# Altium PCB 核心板.PcbDoc (part 2 of 2)
Units mil, origin at the board's own origin, x right, y up, seen from the top; angles counter-clockwise.
Board outline 3687.4 x 2855.91 mil, 2 copper layers (Top Layer, Bottom Layer); 94 components, 147 nets, 533 pads, 209 vias.
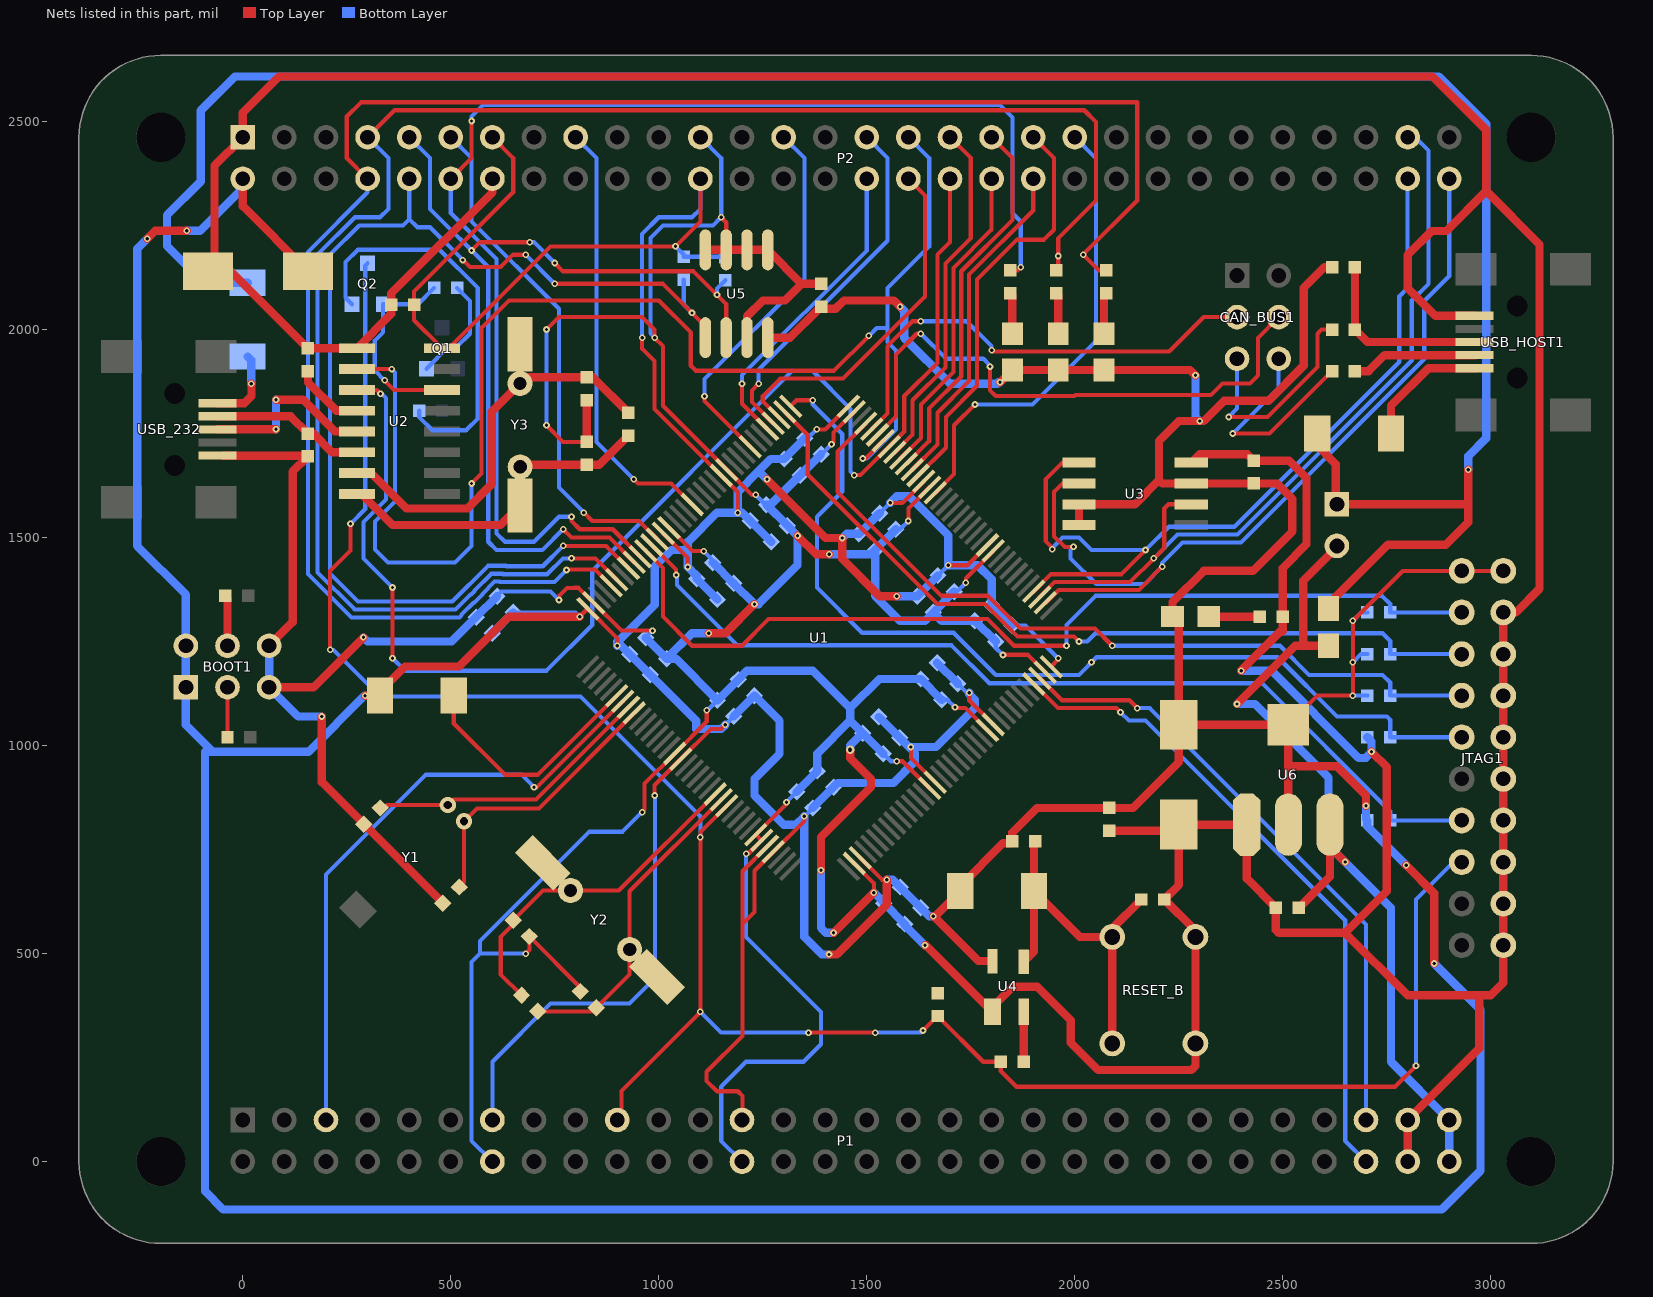
[diagram p2: the nets of this part, all layers, seen from the top]

## Via types
v1: diameter 16, hole 8, Top Layer to Bottom Layer, 208 vias
v2: diameter 20, hole 10, Top Layer to Bottom Layer, 1 vias

## Nets (pads, with @x,y where several pads share a name; then routed paths per layer and width w, separated by ;. In a path a pad name is that pad's centre, name@x,y a point inside that pad or via, vN(x,y) a via of type N, cw(c..) or ccw(c..) an arc to the next point about the centre after c; other vN are vias at no path point) (continued)
GND: BOOT1.5 BOOT1.6 C1.2 C2.2 C3.1 C4.2 C5.2 C6.1 C7.1 C8.2 C9.2 C10.2 C11.2 C12.1 C13.1 C14.1 C15.1 C16.1 C17.1 C18.1 C19.1 C20.1 C21.1 C22.1 C23.1 C24.1 C25.1 C26.1 C27.2 C28.2 C29.2 C30.2 C31.2 C32.2 C33.2 C34.2 C35.2 C36.1 C37.2 C38.2 C39.2 CT1.2 CT2.2 JTAG1.4 JTAG1.6 JTAG1.8 JTAG1.10 JTAG1.12 JTAG1.14 JTAG1.16 JTAG1.18 JTAG1.20 P1.14 P1.26 P1.57 P1.58 P2.1 P2.14 P2.23 R6.1 R11.2 R16.1 RESET_B.1 U1.16 U1.30 U1.31 U1.38 U1.51 U1.61 U1.71 U1.83 U1.94 U1.107 U1.120 U1.130 U1.143 U2.1 U3.4 U4.1 U5.1 U5.2 U5.3 U5.4 U5.7 U6.1 USB_232.5 USB_HOST1.5 | length 25275.8
  Top Layer w10: v1(680,500) 688.89,508.89 C5.2@688.89,541.11 811.11,418.89 C4.2@811.11,408.89 ; v1(730,1770) 770,1730 C24.1@826.69,1730 ; v1(730,2000) 760,2030 960,2030 990,2000 v1(990,1980) 1010,1960 1010,1816.82 U1.120@1163.8,1663.03 1224.28,1602.55 v1(1233.05,1602.55) ; v1(760,1350) 760,1360 779,1379 796.98,1379 797.25,1379.26 807.27,1379.26 U1.143@843.65,1342.88 910.24,1276.29 v1(984.82,1276.29) ; v1(960,840) 966,846 966,908.45 U1.16@1038.52,980.98 1115.34,1057.79 v1(1115.34,1085.16) ; U1.130@1024.6,1523.83 1081.1,1467.34 v1(1107.84,1467.34) ; v1(1150,2270) 1162,2258 U5.3@1162,2191.46 ; v1(1210,740) 1215.13,740 U1.31@1247.31,772.18 U1.30@1233.4,786.1 1306.84,859.55 v1(1306.84,863.66) ; v1(1415.14,1724.35) 1420,1729.21 1420,1752.19 U1.107@1470.03,1802.22 ; U1.38@1469.12,716.51 U1.38@1470.03,716.51 1517.57,668.96 1517.57,647.07 v1(1516.97,646.47) ; v1(1571.82,962.32) 1586.11,962.32 U1.51@1650.98,897.46 ; v1(1600,1540) 1600,1570.29 U1.94@1650.98,1621.27 ; v1(1711.82,1092.32) 1714.14,1090 1736.82,1090 U1.61@1790.17,1036.65 ; v1(1738.2,1391.3) 1738.2,1402.26 U1.83@1804.09,1468.15 ; v1(1827.22,1217.72) 1827.98,1218.48 1886.73,1218.48 U1.71@1929.37,1175.85
  Top Layer w20: CT1.2@-90,2140 CT1.2@-83.31,2140 ; CT1.2@-73,2150.31 CT1.2@-83.31,2140 ; USB_232.5@-48.01,1697.01 15.75,1697.01 154.68,1697.01 R11.2@156.69,1695 120,1658.31 120,1296.69 BOOT1.6@63.31,1240 ; BOOT1.5@63.31,1140 170,1140 v1(290,1260) ; v1(190,1070) 190,912.22 C2.2@481.11,621.11 ; P2.14@600,2362.2 600,2330 356.69,2086.69 C3.1@356.69,2060 356.69,2037.36 U2.1@274.33,1955 C10.2@156.69,1955 -28.31,2140 CT1.2@-83.31,2140 ; C24.1@826.69,1730 C25.1@826.69,1830 ; U5.4@1112,2191.46 U5.3@1162,2191.46 U5.2@1212,2191.46 U5.1@1262,2191.46 1343.46,2110 ; v1(1120,1270) 1160,1270 v1(1230,1340) ; U5.7@1212,1980.54 1212,2032 1250,2070 1303.46,2070 1343.46,2110 ; v1(1333.62,1504.13) 1377.75,1460 v1(1410,1460) ; v1(1390,700) 1390,780 1510,900 1510,920 1460,970 v2(1460,990) ; C26.1@1390,2110 1343.46,2110 ; v1(1420,550) 1420.5,550 v1(1516.97,646.47) ; v1(1640,520) 1642.04,520 U4.1@1802.04,360 1802.04,372.04 1850,420 1910,420 1990,340 1990,286.13 2056.13,220 2280,220 2290,230 RESET_B.1@2290,540 2290,555 C27.2@2215,630 2250,665 CT2.2@2250,810 ; C37.2@2083.31,795 2235,795 CT2.2@2250,810 ; U3.4@2280,1680.06 2299.94,1700 2415,1700 C11.2@2424.94,1690.06 ; v1(2400,1180) 2495,1275 2500,1275 2500,1379 2500,1427 2557,1484 2557,1643 2515,1685 C11.2@2430,1685 ; v1(2713.31,985) 2750,948.31 2750,650 2650,550 ; P1.58@2800,0 P1.57@2800,100 2972,272 2972,400 ; USB_HOST1.5@2960.94,2032.99 2867.01,2032.99 2800,2100 2800,2179 2858,2237 2893,2237 2989,2333 ; CT1.2@-83.31,2140 -68,2155.31 -68,2394.2 P2.1@0,2462.2 0,2521.2 87,2608.2 2860,2608.2 2989,2479.2 2989,2333 ; CT2.2@2250,810 2250.06,809.94 U6.1@2413.34,809.94 2413.34,679.97 C36.1@2483.31,610 2483.31,556.69 2490,550 2650,550 ; 2650,550 2800,400 2972,400 ; 2972,400 3000,400 3030,430 JTAG1.20@3030,520 JTAG1.18@3030,620 JTAG1.16@3030,720 JTAG1.14@3030,820 JTAG1.12@3030,920 JTAG1.10@3030,1020 JTAG1.8@3030,1120 JTAG1.6@3030,1220 JTAG1.4@3030,1320 3060,1320 3117,1377 3117,2205 2989,2333
  Bottom Layer w10: P1.14@600,0 550,50 550,480 569.99,499.99 ; C38.2@611.11,1358.89 622.22,1370 740,1370 v1(760,1350) ; v1(680,500) 569.99,499.99 ; v1(730,1770) v1(730,2000) ; v1(960,840) 913,793 833,793 570,530 570,499.99 ; C34.2@968.89,1258.89 968.24,1259.54 968.24,1259.71 v1(984.82,1276.29) ; v1(990,1980) 990,1981.11 980,1991.11 980,2220 1010,2250 1130,2250 v1(1150,2270) 1150,2412.2 P2.23@1100,2462.2 ; v1(1107.84,1467.34) 1130,1445.18 C6.1@1130,1440 ; v1(1115.34,1085.16) 1116.18,1084.32 1116.54,1084.32 C32.2@1141.11,1108.89 ; P1.26@1200,0 1150,50 1150,180 1210,240 1348,240 1390,282 1390,360 1210,540 v1(1210,740) ; v1(1233.05,1602.55) 1256.71,1578.89 C8.2@1258.89,1578.89 ; v1@1306.84,864.62 C30.2@1331.11,888.89 ; C12.1@1390,1700 1390.79,1700 v1(1415.14,1724.35) ; C22.1@1540,980 1557.68,962.32 v1(1571.82,962.32) ; C14.1@1570,1520 1580,1520 v1(1600,1540) ; C20.1@1680,1110 1694.14,1110 v1(1711.82,1092.32) ; C16.1@1710,1370 1716.9,1370 v1(1738.2,1391.3) ; C18.1@1810,1250 1810,1234.94 v1(1827.22,1217.72)
  Bottom Layer w20: BOOT1.6@63.31,1240 BOOT1.5@63.31,1140 133.31,1070 v1(190,1070) ; v1(290,1260) 300,1250 502.22,1250 C39.2@561.11,1308.89 C38.2@611.11,1358.89 ; C34.2@968.89,1258.89 C35.2@1018.89,1208.89 ; v1(1120,1270) 1080,1270 C35.2@1018.89,1208.89 ; C6.1@1130,1440 C7.1@1180,1390 v1(1230,1340) 1240,1340 1333.62,1433.62 v1(1333.62,1504.13) C9.2@1308.89,1528.89 ; C9.2@1308.89,1528.89 C8.2@1258.89,1578.89 1268.89,1578.89 C13.1@1340,1650 C12.1@1390,1700 ; C30.2@1331.11,888.89 C31.2@1381.11,938.89 1381.11,981.11 1460,1060 ; v1(1390,700) 1390,562 1402,550 v1(1420,550) ; v1(1410,1460) 1510,1460 C15.1@1520,1470 ; v2(1460,990) 1460,1000 C23.1@1490,1030 ; v1(1516.97,646.47) 1541.11,622.33 C28.2@1541.11,621.11 C29.2@1591.11,571.11 1591.11,568.89 v1(1640,520) ; C22.1@1540,980 C23.1@1490,1030 ; C14.1@1570,1520 C15.1@1520,1470 ; C20.1@1680,1110 C21.1@1630,1160 1530,1160 1460,1090 ; C16.1@1710,1370 C17.1@1660,1320 ; C18.1@1810,1250 C19.1@1760,1300 1680,1300 C17.1@1660,1320 ; v1(2400,1180) 2472.35,1180 2682.35,970 2700,970 2700,971.69 v1(2713.31,985) 2713.31,1010 R16.1@2703.31,1020 ; C35.2@1018.89,1208.89 1041.11,1208.89 C32.2@1141.11,1108.89 C33.2@1191.11,1158.89 1212.22,1180 1370,1180 1460,1090 ; 1460,1060 1460,1090 ; 1460,1060 C23.1@1490,1030 ; C15.1@1520,1470 1520,1360 1580,1300 1640,1300 C17.1@1660,1320
I2C1_SCL: P2.9 R22.1 U1.136 U5.6 | length 2270
  Top Layer w10: v1(550,2190) 570,2210 v1(690,2210) ; v1(750,2160) 770,2140 1083.5,2140 v1(1140,2083.5) 1162,2061.5 U5.6@1162,1980.54 ; v1(770,1520) 790,1500 881.4,1500 U1.136@941.09,1440.32
  Bottom Layer w10: P2.9@400,2462.2 450,2412.2 450,2290 590,2150 590,1490 610,1470 720,1470 v1(770,1520) ; v1(690,2210) 700,2210 v1(750,2160) ; v1(1140,2083.5) 1140,2098.5 R22.1@1160,2118.5
I2C1_SDA: P2.10 R17.1 U1.137 U5.5 | length 2893.5
  Top Layer w10: v1(529,2167) 546,2150 620,2150 650,2180 v1(680,2180) ; v1(750,2110) 1010,2110 v1(1080,2040) 1112,2008 U5.5@1112,1980.54 ; v1(770,1480) 873.56,1480 U1.137@927.17,1426.4
  Bottom Layer w10: 400,2296 P2.10@400,2362.2 ; v1(529,2167) 450,2246 420,2246 400,2266 400,2291.59 400,2265 385,2250 280,2250 210,2180 210,1413.18 277.18,1346 503.47,1346 589.57,1432.1 632.65,1432.1 633.77,1430.98 720.98,1430.98 v1(770,1480) ; v1(680,2180) v1(750,2110) ; R17.1@1060,2120 1060,2060 v1(1080,2040)
JTCK: JTAG1.9 R16.2 U1.109 | length 2322.1
  Top Layer w10: U1.109@1316.91,1816.14 1330.77,1830 v1(1370,1830)
  Bottom Layer w10: v1(1370,1830) 1370,1820 1441,1749 1441,1611 1380,1550 1380,1380 1488.88,1271.12 1708.88,1271.12 1810,1170 2010,1170 2052.26,1212.26 2487.74,1212.26 2630,1070 2750,1070 2758.31,1061.69 R16.2@2758.31,1020 JTAG1.9@2930,1020
  other v1: 2040,1200
JTDI: JTAG1.5 R14.2 U1.110 | length 1959.1
  Top Layer w10: U1.110@1302.99,1802.22 1302.99,1801.25 1358.11,1746.13 1358.11,1651.89 1670,1340 1784.13,1340 1862,1262.13 1997.87,1262.13 v1(2010,1250)
  Bottom Layer w10: v1(2010,1250) 2030,1250 2050,1270 2740,1270 2758.31,1251.69 R14.2@2758.31,1220 JTAG1.5@2930,1220
JTDO: JTAG1.13 R23.2 U1.133 | length 2255.3
  Top Layer w10: U1.133@982.85,1482.07 1041.61,1423.31 v1(1041.61,1410)
  Bottom Layer w10: v1(1041.61,1410) 1042.84,1410 1043.62,1409.22 1043.62,1386.38 1189,1241 1703.25,1241 1794.25,1150 2450,1150 2758.31,841.69 R23.2@2758.31,820 JTAG1.13@2930,820
JTMS: JTAG1.7 R15.2 U1.105 | length 1914
  Top Layer w10: U1.105@1497.86,1774.38 1430,1706.52 1430,1610 1680,1360 1791,1360 1869.87,1281.13 2048.87,1281.13 v1(2090,1240)
  Bottom Layer w10: v1(2090,1240) 2493.1,1240 2563.1,1170 2740,1170 2758.31,1151.69 R15.2@2758.31,1120 JTAG1.7@2930,1120
JTRST: JTAG1.3 R13.2 U1.134 | length 2284.5
  Top Layer w10: U1.134@968.93,1468.15 1010,1427.08 1010,1310 1080,1240 1200,1240 1264,1304 1790,1304 1854,1240 v1(1980,1240)
  Bottom Layer w10: v1(1980,1240) 1980,1290 2050,1360 2738.31,1360 2758.31,1340 R13.2@2758.31,1320 JTAG1.3@2930,1320
LED0: P2.7 R4.1 U1.139 | length 4189.5
  Top Layer w10: P2.7@300,2462.2 365,2527.2 2022.8,2527.2 2050.87,2499.13 2050.87,2310 1960,2219.13 v1(1960,2177) 1960,2146 1956,2142 R4.1@1955,2142 ; v1(790,1450) 847.89,1450 U1.139@899.33,1398.56
  Bottom Layer w10: P2.7@300,2462.2 350,2412.2 350,2290 330,2270 270,2270 180,2180 180,1416.31 269.31,1327 511.34,1327 547.44,1363.1 549.03,1363.1 556.9,1370.97 556.9,1372.56 597.44,1413.1 624.78,1413.1 625.9,1411.98 731.98,1411.98 770,1450 v1(790,1450)
LED1: P2.8 R5.1 U1.140 | length 4422.8
  Top Layer w10: P2.8@300,2362.2 250,2412.2 250,2512.2 284,2546.2 2150,2546.2 2150,2310 v1(2020,2180) 2058,2142 R5.1@2075,2142 ; v1(778,1422) 779,1423 847.05,1423 U1.140@885.41,1384.64
  Bottom Layer w10: P2.8@300,2362.2 300,2330 156.69,2186.69 156.69,1412.75 261.44,1308 520.8,1308 525.9,1313.1 525.9,1314.69 555.31,1344.1 556.9,1344.1 575.9,1363.1 575.9,1364.69 605.31,1394.1 616.91,1394.1 618.03,1392.98 748.98,1392.98 v1(778,1422)
LED2: P2.12 R7.1 U1.135 | length 3212.7
  Top Layer w10: P2.12@500,2362.2 550,2412.2 v1(550,2501.2) ; v1(790,1550) 790,1540 810,1520 889.24,1520 U1.135@955.01,1454.24 ; R7.1@1845,2142 1862,2142 v1(1870,2150)
  Bottom Layer w10: P2.12@500,2362.2 500,2280 610,2170 610,1510 630,1490 700,1490 760,1550 v1(790,1550) ; v1(550,2501.2) 550,2512.2 577.8,2540 1820,2540 1850,2510 1850,2280 1870,2260 v1(1870,2150)
NetBOOT1_3: BOOT1.3 R20.1 | length 120
  Top Layer w10: R20.1@-36.69,1020 BOOT1.3@-36.69,1140
NetBOOT1_4: BOOT1.4 R21.2 | length 122.1
  Top Layer w20: R21.2@-41.69,1360 -36.69,1355 BOOT1.4@-36.69,1240
NetC10_1: C10.1 U2.4 | length 172.6
  Top Layer w20: C10.1@156.69,1900 156.69,1873.31 225,1805 U2.4@274.33,1805
NetC24_2: C24.2 R10.2 U2.8 Y3.1 | length 734.1
  Top Layer w20: U2.8@274.33,1605 285,1605 360,1530 619.34,1530 Y3.1@666.69,1577.35 ; Y3.1@666.69,1670 671.69,1675 C24.2@826.69,1675 856.69,1675 R10.2@926.69,1745
NetC25_2: C25.2 R10.1 U2.7 Y3.2 | length 1049.5
  Top Layer w20: U2.7@274.33,1655 308.15,1655 393.15,1570 540,1570 598.19,1628.19 598.19,1802.36 Y3.2@666.27,1870.43 ; Y3.2@666.23,1964.61 666.27,1964.57 Y3.2@666.27,1870.43 ; R10.1@926.69,1800 841.69,1885 680.83,1885 Y3.2@666.27,1870.43
NetCAN_BUS1_5: CAN_BUS1.5 R24.2 | length 530.4
  Top Layer w10: v1(2370,1790) 2463.31,1790 2583.31,1910 2583.31,1990 2593.31,2000 R24.2@2618.31,2000
  Bottom Layer w10: v1(2370,1790) 2390,1810 CAN_BUS1.5@2390,1930
NetCAN_BUS1_6: CAN_BUS1.6 R25.2 | length 526
  Top Layer w10: v1(2380,1750) 2468.31,1750 R25.2@2618.31,1900
  Bottom Layer w10: v1(2380,1750) 2490,1860 CAN_BUS1.6@2490,1930
NetD1_2: D1.2 U1.6 | length 589
  Top Layer w10: D1.2@507.17,1120 507.17,1052.83 630,930 709.16,930 U1.6@899.33,1120.17
NetD3_1: D3.1 USB_232.1 | length 188
  Top Layer w20: USB_232.1@-60.94,1822.99 3.99,1822.99 21,1840 21,1869 v1(20,1870)
  Bottom Layer w20: D3.1@11.81,1935.2 20,1927.01 v1(20,1870)
NetD4_1: D4.1 USB_HOST1.1 | length 334.4
  Top Layer w20: D4.1@2770,1727 2760,1737 2760,1817 2850.01,1907.01 USB_HOST1.1@2963,1907.01
NetLED1_2: LED1.2 R5.2 | length 99.1
  Top Layer w20: LED1.2@2070,1990 2070,2082 R5.2@2075,2087
NetLED2_2: LED2.2 R4.2 | length 99.1
  Top Layer w20: R4.2@1955,2087 1960,2082 LED2.2@1960,1990
NetLED3_2: LED3.2 R7.2 | length 99.1
  Top Layer w20: R7.2@1845,2087 1850,2082 LED3.2@1850,1990
NetPOWER1_2: POWER1.2 R6.2 | length 123
  Top Layer w20: POWER1.2@2322.01,1310 R6.2@2445,1310
NetQ1_2: Q1.2 R2.2 | length 262.1
  Bottom Layer w10: Q1.2@441.65,1905.79 494.86,1959 515,1959 546,1990 546,2069 R2.2@515,2100
NetQ2_2: Q2.2 R3.2 | length 971.1
  Bottom Layer w10: Q2.2@262.6,2060.79 247,2076.39 247,2162.43 276.48,2191.91 472.89,2191.91 565,2099.8 565,1786 537,1758 456,1758 424.05,1789.95 R3.2@424.05,1805
NetR11_1: R11.1 U2.6 USB_232.2 | length 371.1
  Top Layer w20: USB_232.2@-60.94,1791.5 115.19,1791.5 R11.1@156.69,1750 170,1750 215,1705 U2.6@274.33,1705
NetR18_2: R18.2 U4.2 | length 120
  Top Layer w20: R18.2@1877.04,240 U4.2@1877.04,360
NetR24_1: R24.1 R26.1 USB_HOST1.3 | length 451.1
  Top Layer w20: R26.1@2673.31,2150 R24.1@2673.31,2000 2703.31,1970 USB_HOST1.3@2962,1970
NetR25_1: R25.1 USB_HOST1.2 | length 304.6
  Top Layer w20: R25.1@2673.31,1900 2706.38,1900 2744.88,1938.5 USB_HOST1.2@2962,1938.5
NetU2_5: U2.5 USB_232.3 | length 437.8
  Top Layer w20: USB_232.3@-60.94,1760 15.75,1760 v1(80,1760) ; v1(80,1831) 145.69,1831 221.69,1755 U2.5@274.33,1755
  Bottom Layer w20: v1(80,1760) v1(80,1831)
NTRST: R19.2
OSC32_IN: C1.1 U1.8 Y1.1 | length 701.7
  Top Layer w10: C1.1@330,840 347.07,857.07 Y1.1@492.93,857.07 505.86,870 704.84,870 U1.8@927.17,1092.33
OSC32_OUT: C2.1 U1.9 Y1.2 | length 680.1
  Top Layer w10: C2.1@520,660 531.82,671.82 Y1.2@531.82,818.18 562.64,849 711.68,849 U1.9@941.09,1078.41
OSC_IN: C5.1 R1.1 U1.23 Y2.2 | length 824.8
  Top Layer w10: R1.1@670,400 620,450 620,540 650,570 C5.1@650,580 721.43,651.43 Y2.2@787.97,651.43 903.85,651.43 U1.23@1135.96,883.54
OSC_OUT: C4.1 R1.2 U1.24 Y2.1 | length 768.6
  Top Layer w10: R1.2@708.89,361.11 841.11,361.11 C4.1@850,370 930,450 Y2.1@930,510 930,649.74 U1.24@1149.88,869.62
PA8: P2.35 U1.100 | length 853.7
  Top Layer w10: U1.100@1567.46,1704.78 1610,1747.32 1610,1830 1689,1909 1689,2159 1750,2220 1750,2412.2 P2.35@1700,2462.2
PA9: P2.36 U1.101 U2.3 | length 3258.7
  Top Layer w10: U2.3@274.33,1855 322,1855 v1(331,1846) ; v1(360,1210) v1(360,1380) ; v1(1470,1650) 1484.84,1650 U1.101@1553.54,1718.7 1590,1755.16 1590,1840 1670,1920 1670,2180 1700,2210 P2.36@1700,2362.2
  Bottom Layer w10: v1(331,1846) 333,1846 344,1835 344,1591.13 290,1537.13 290,1450 v1(360,1380) ; v1(360,1210) 390,1180 730,1180 840,1290 840,1420 1320,1900 1370,1900 1461.12,1808.88 1461.12,1658.88 v1(1470,1650)
PA10: P2.33 U1.102 U2.2 | length 3447.8
  Top Layer w10: U2.2@274.33,1905 v1(358,1905) ; v1(550,1630) 574.19,1654.19 574.19,2004.2 639.99,2070 1000,2070 1077,1993 1077,1913 1088.87,1901.13 1421.13,1901.13 v1(1505,1985) ; v1(1490,1690) 1497,1690 U1.102@1539.62,1732.62
  Bottom Layer w10: v1(358,1905) 366,1897 366,1586.26 318.07,1538.33 318.07,1470.95 349.02,1440 510,1440 550,1480 v1(550,1630) ; v1(1490,1690) 1500,1690 1570,1760 1570,1950 1550,1970 1550,2004 ; v1(1505,1985) 1524,2004 1550,2004 ; P2.33@1600,2462.2 1650,2412.2 1650,2200 1550,2100 1550,2004
PA11: CAN_BUS1.4 U1.103 | length 1382
  Top Layer w10: U1.103@1525.7,1746.54 1570,1790.84 1570,1940 1620,1990 v1(1630,1990) ; v1(1796,1911) 1797,1910 1797,1907 1796,1906 1796,1854 1810,1840 1998.89,1840 2001.76,1842.87 2326.87,1842.87 2354.75,1870.75 2420.75,1870.75 2440,1890 2440,1980 CAN_BUS1.4@2490,2030
  Bottom Layer w10: v1(1630,1990) 1690,1930 1780,1930 1796,1914 v1(1796,1911)
PA12: CAN_BUS1.3 U1.104 | length 1150.7
  Top Layer w10: U1.104@1511.78,1760.46 1550,1798.68 1550,1960 1610,2020 v1(1630,2020) ; v1(1800,1950) 1803,1947 2227,1947 2310,2030 CAN_BUS1.3@2390,2030
  Bottom Layer w10: v1(1630,2020) 1740,2020 1800,1960 v1(1800,1950)
PB10: P1.56 U1.69 | length 1584.5
  Top Layer w10: U1.69@1901.53,1148.01 1959.53,1090 2100,1090 v1(2110,1080)
  Bottom Layer w10: v1(2110,1080) 2130,1060 2170,1060 2650,580 2650,550 2650,50 P1.56@2700,0
PB11: P1.55 U1.70 | length 1499.7
  Top Layer w10: U1.70@1915.45,1161.93 1916.41,1161.93 1969.34,1109 2131,1109 v1(2150,1090)
  Bottom Layer w10: v1(2150,1090) 2180,1090 2700,570 P1.55@2700,100
PB13: P2.60 U1.74 U3.6 | length 2143.7
  Top Layer w10: U1.74@1929.37,1342.88 1930.33,1342.88 1961.45,1374 2154,1374 v1(2210,1430) ; v1(1997,1478) 1996,1477 1976,1477 1950,1503 1950,1610 1970,1630 U3.6@2010,1630
  Bottom Layer w10: v1(1997,1478) 1990,1471 1990,1450 2051.5,1388.5 2168.5,1388.5 v1(2210,1430) 2210,1438.84 2259.16,1488 2399.11,1488 2840,1928.89 2840,2068.84 2900,2128.84 P2.60@2900,2362.2
PB14: P2.57 U1.75 U3.2 | length 1913.9
  Top Layer w10: U1.75@1915.45,1356.8 1951.65,1393 2133,1393 v1(2190,1450) 2215,1475 2215,1570 2225.06,1580.06 U3.2@2280,1580.06
  Bottom Layer w10: v1(2190,1450) 2247,1507 2391.24,1507 2810,1925.76 2810,2070 2850,2110 2850,2430 2817.8,2462.2 P2.57@2800,2462.2
PB15: P2.58 U1.76 U3.5 | length 2076.2
  Top Layer w10: U1.76@1901.53,1370.72 1942.81,1412 2112,1412 v1(2170,1470) ; v1(1946,1472) 1946,1475.36 1930,1491.36 1930,1640 1970,1680 U3.5@2010,1680
  Bottom Layer w10: v1(1946,1472) 1946,1475.52 1970.48,1500 2010,1500 2040,1470 v1(2170,1470) 2226,1526 2383.37,1526 2780,1922.63 2780,2080 2800,2100 P2.58@2800,2362.2
PC6: P2.39 U1.96 | length 1019.5
  Top Layer w10: U1.96@1623.14,1649.11 1690,1715.97 1690,1790 1765,1865 1765,2120 1861,2216 1926,2216 1950,2240 1950,2412.2 P2.39@1900,2462.2 P2.39@1900,2450
PC7: P2.40 U1.97 | length 819.6
  Top Layer w10: U1.97@1609.22,1663.03 1670,1723.81 1670,1800 1746,1876 1746,2132.31 1900,2286.31 P2.40@1900,2362.2
PC8: P2.37 U1.98 | length 911.5
  Top Layer w10: U1.98@1595.3,1676.95 1650,1731.65 1650,1810 1727,1887 1727,2140.18 1850,2263.18 1850,2412.2 P2.37@1800,2462.2
PC9: P2.38 U1.99 | length 761.9
  Top Layer w10: U1.99@1581.38,1690.86 1630,1739.48 1630,1820 1708,1898 1708,2148.05 1800,2240.05 P2.38@1800,2362.2
PC10: P2.34 U1.111 | length 856.7
  Top Layer w10: U1.111@1289.07,1788.3 1250,1827.37 1250,1840 1292.13,1882.13 1443.13,1882.13 1640,2079 1640,2322.2 P2.34@1600,2362.2
PC11: P2.31 U1.112 | length 864.9
  Top Layer w10: v1(1240,1870) 1223.81,1853.81 1223.81,1825.72 U1.112@1275.15,1774.38
  Bottom Layer w10: v1(1240,1870) 1240,1903.41 1550,2213.41 1550,2412.2 P2.31@1500,2462.2
PC12: P2.32 U1.113 | length 751.4
  Top Layer w10: v1(1200,1870) 1200,1821.7 U1.113@1261.23,1760.46
  Bottom Layer w10: v1(1200,1870) 1200,1890.28 1500,2190.28 P2.32@1500,2362.2
PC13: P1.5 U1.7 | length 1500.5
  Top Layer w10: v1(700,900) 707,900 U1.7@913.25,1106.25
  Bottom Layer w10: P1.5@200,100 200,690 440,930 670,930 v1(700,900)
PD2: P2.27 U1.116 | length 909
  Top Layer w10: v1(1110,1840) 1110,1828.18 U1.116@1219.48,1718.7
  Bottom Layer w10: v1(1110,1840) 1110,1880.89 1350,2120.89 1350,2412.2 P2.27@1300,2462.2
PG8: P2.41 U1.93 | length 1116.9
  Top Layer w10: U1.93@1664.9,1607.35 1710,1652.45 1710,1770 v1(1760,1820)
  Bottom Layer w10: v1(1760,1820) 1898.5,1820 2050.87,1972.37 2050.87,2411.33 P2.41@2000,2462.2
PG11: P2.17 U1.126 | length 1045.5
  Top Layer w10: v1(940,1640) 950,1630 1029.79,1630 U1.126@1080.28,1579.51
  Bottom Layer w10: P2.17@800,2462.2 850,2412.2 850,1730 v1(940,1640)
PG15: P2.11 U1.132 | length 1238
  Top Layer w10: v1(820,1560) 840,1540 952.76,1540 U1.132@996.77,1495.99
  Bottom Layer w10: P2.11@500,2462.2 550,2412.2 550,2260 760,2050 760,1620 v1(820,1560)
RESET: JTAG1.15 P1.19 Q2.3 R18.1 R19.1 U1.25 | length 5346.7
  Top Layer w10: v1(210,1230) 210,1420 259,1469 v1(259,1533) ; P1.19@900,100 910,110 910,170 v1(1100,360) v1(1100,780) 1100,791.9 U1.25@1163.8,855.7 ; v1(1360,310) v1(1520,310) ; v1(1635,315) R19.1@1670,350 1780,240 R18.1@1822.04,240 1822.04,217.96 1860,180 2770,180 v1(2820,230)
  Bottom Layer w10: v1(210,1230) 217.94,1230 318,1129.94 318,1128.35 328.35,1118 812,1118 1100,830 v1(1100,780) ; v1(259,1533) 294.31,1568.31 294.31,2153.53 Q2.3@300,2159.21 ; v1(1100,360) 1150,310 v1(1360,310) ; v1(1520,310) 1630,310 v1(1635,315) ; v1(2820,230) 2820,630 2910,720 JTAG1.15@2930,720
RSTIN: C27.1 D5.1 R12.2 RESET_B.2 U4.3 | length 910
  Top Layer w20: U4.3@1877.04,480 1902.04,505 D5.1@1902.04,650 ; R12.2@1905,770 1902.04,767.04 D5.1@1902.04,650 ; RESET_B.2@2090,284.09 RESET_B.2@2090,540 ; C27.1@2160,630 2090,560 RESET_B.2@2090,540 ; D5.1@1902.04,650 2012.04,540 RESET_B.2@2090,540
RTS: Q2.1 R2.1 U2.14 | length 487.3
  Top Layer w10: v1(341,1878) 364,1855 U2.14@479.05,1855
  Bottom Layer w10: v1(341,1878) 317.4,1901.6 317.4,1973.4 337.4,1993.4 Q2.1@337.4,2060.79 420.79,2060.79 R2.1@460,2100
USB_5V1: D3.2 D4.2 F1.2 P5.1 | length 5678.3
  Top Layer w10: F1.2@2610.06,1330 F1.2@2630,1349.94
  Top Layer w20: D4.2@2577,1727 2627,1677 2627,1583 P5.1@2630,1580 2941,1580 2946,1585 ; F1.2@2610.06,1330 2610.06,1340.06 2753,1483 2892,1483 2946,1537 2946,1585 ; v1(2946,1663) 2946,1585
  Bottom Layer w20: D3.2@11.81,2112.36 -93.36,2112.36 -182,2201 -182,2275 -101,2356 -101,2526.2 -19,2608.2 2875,2608.2 2989,2494.2 2989,1739 2946,1696 v1(2946,1663)
VCC5V: C36.2 F1.1 P1.59 P1.60 P5.2 U6.3 | length 2227.9
  Top Layer w20: v1(2390,1100) 2530,1240 2558,1240 ; C36.2@2538.31,610 2613.34,685.03 U6.3@2613.34,809.94 2613.34,756.66 v1(2650,720) ; F1.1@2610.06,1240 2558,1240 ; P5.2@2630,1480 2630,1477 2549,1396 2549,1249 2558,1240
  Bottom Layer w20: v1(2390,1100) 2432.94,1100 2610,922.94 2610,760 v1(2650,720) 2760,610 2760,240 P1.59@2900,100 P1.60@2900,0
VDDA: BOOT1.1 BOOT1.2 C3.2 C6.2 C7.2 C8.1 C9.1 C11.1 C12.2 C13.2 C14.2 C15.2 C16.2 C17.2 C18.2 C19.2 C20.2 C21.2 C22.2 C23.2 C26.2 C28.1 C29.1 C30.1 C31.1 C32.1 C33.1 C34.1 C35.1 C37.1 C38.1 C39.1 CT1.1 CT2.1 D1.1 D5.2 JTAG1.1 JTAG1.2 LED1.1 LED2.1 LED3.1 P1.13 P1.25 P2.2 P2.13 P2.24 POWER1.1 R12.1 R13.1 R14.1 R15.1 R17.2 R22.2 R23.1 R26.2 U1.17 U1.32 U1.33 U1.39 U1.52 U1.62 U1.72 U1.84 U1.95 U1.108 U1.121 U1.131 U1.144 U2.16 U3.3 U3.7 U3.8 U4.4 U5.8 U6.2 U6.4 | length 25452.7
  Top Layer w10: P2.13@600,2462.2 650,2412.2 650,2330 411.69,2091.69 411.69,2022.36 475.03,1959.03 499.03,1959.03 740,2200 v1(1040,2200) 1100,2260 P2.24@1100,2362.2 ; v1(810,1310) 828.96,1328.96 U1.144@829.73,1328.96 900,1258.69 v1(900,1240) ; v1(960,1980) 960,1954 990,1924 990,1808.99 U1.121@1149.88,1649.11 1190,1608.99 v1(1190,1560) ; v1(990,880) 990,904.61 U1.17@1052.44,967.06 1125.39,1040 1150,1040 v1(1160,1050) ; U1.131@1010.69,1509.91 1069.75,1450.85 v1(1069.75,1429.24) ; P1.25@1200,100 1200.87,100.87 1200.87,158.01 1189.89,169 1140,169 1115,194 1115,216 1200.87,301.87 1200.87,570.87 ; U1.32@1261.23,758.26 1200.87,697.9 1200.87,570.87 ; v1(1350,830) 1350,819.19 U1.33@1275.15,744.35 1230,699.19 1230,600 1200.87,570.87 ; v1(1379.36,1760.14) 1400.11,1760.14 U1.108@1456.11,1816.14 ; U1.39@1483.76,730.43 U1.39@1483.94,730.43 1536.69,677.68 v1(1548.18,677.68) ; v1(1556.04,1583.46) 1585.33,1583.46 U1.95@1637.06,1635.19 ; v1(1605.98,996.48) 1605.98,970.3 U1.52@1664.9,911.38 ; v1(1696.02,1433.48) 1741.58,1433.48 U1.84@1790.17,1482.07 ; v1(1746.2,1126.7) 1746.2,1108.46 U1.62@1804.09,1050.57 ; U1.72@1943.28,1189.77 1960,1206.48 v1(1960,1210) ; CT2.1@2250,1050 CT2.1@2250.06,1049.94 ; U6.4@2513.34,1049.94 2583.4,1120 v1(2668.31,1120) v1(2668.31,1200) v1(2668.31,1300) 2788.31,1420 JTAG1.1@2930,1420 JTAG1.2@3030,1420
  Top Layer w20: v1(-230,2218.2) -211,2237.2 v1(-135,2237.2) ; P2.2@0,2362.2 0,2296.69 CT1.1@156.69,2140 ; v1(294,1120) 320,1120 390,1190 520,1190 640,1310 v1(810,1310) ; v1(1260,1640) 1400.86,1499.14 v1(1441.36,1499.14) 1441.36,1448.64 1531.11,1358.89 v1(1571.61,1358.89) ; U5.8@1262,1980.54 1315.54,1980.54 1385,2050 1425,2050 1445,2070 1565,2070 v1(1580,2055) ; v1(1409,498) 1428,498 1548.18,618.18 v1(1548.18,677.68) ; U4.4@1802.04,482.05 1767.95,482.05 v1(1660,590) 1664.87,590 D5.2@1724.87,650 1724.87,662.87 1827.49,765.49 1845.49,765.49 R12.1@1850,770 1850,791 1909,850 C37.1@2083.31,850 2140,850 2250,960 CT2.1@2250,1050 2250,1295 POWER1.1@2235,1310 2235,1345 2310,1420 2428,1420 2523,1515 2523,1592.87 2485.87,1630 C11.1@2430,1630 2429.94,1630.06 U3.3@2280,1630.06 ; v1(1820,1872.99) LED3.1@1850,1902.99 LED2.1@1960,1902.99 LED1.1@2070,1902.99 2277.01,1902.99 v1(2290,1890) ; U3.8@2010,1530 U3.7@2010,1580 2144.28,1580 2202.17,1637.89 ; CT2.1@2250.06,1049.94 U6.4@2513.34,1049.94 2513.34,940 ; U3.3@2290,1630.06 U3.3@2280,1630.06 ; U3.3@2310,1630.06 U3.3@2280,1630.06 ; U6.2@2513.34,809.94 2513.34,940 ; R26.2@2618.31,2150 2600,2150 2550,2100 2550,1913 2465.68,1828.68 2358.68,1828.68 2310,1780 v1(2300,1780) 2250,1780 2202.17,1732.17 2202.17,1637.89 ; v1(2700,855) 2700,880 2630,950 2523.34,950 2513.34,940 ; v1(2797,712) 2864,645 v1(2864,476) ; 2202.17,1637.89 2210,1630.06 U3.3@2280,1630.06
  Bottom Layer w10: P1.13@600,100 600,240 740,380 930,380 990.87,440.87 990.87,879.13 v1(990,880) ; C38.1@650,1320 800,1320 v1(810,1310) ; v1(960,1980) 960,2230 1000,2270 1080,2270 1100,2290 P2.24@1100,2362.2 ; v1(1040,2200) 1060,2180 R17.2@1060,2175 1158.5,2175 R22.2@1160,2173.5 ; v1(1160,1050) C32.1@1180,1070 ; v1(1350,830) C30.1@1370,850 ; C12.2@1351.11,1738.89 1358.11,1738.89 v1(1379.36,1760.14) ; C14.2@1531.11,1558.89 1531.47,1558.89 v1(1556.04,1583.46) ; v1@1601.3,996.48 v1(1605.98,996.48) ; C16.2@1671.11,1408.89 1671.43,1408.89 v1(1696.02,1433.48) ; C20.2@1718.89,1148.89 1741.08,1126.7 v1(1746.2,1126.7) ; C18.2@1848.89,1288.89 1881.11,1288.89 v1(1960,1210) ; v1(2668.31,1120) R15.1@2703.31,1120 ; v1(2668.31,1200) 2688.31,1220 R14.1@2703.31,1220 ; v1(2668.31,1300) 2688.31,1320 R13.1@2703.31,1320
  Bottom Layer w20: v1(-230,2218.2) -254,2194.2 -254,1480 -136.69,1362.69 BOOT1.2@-136.69,1240 BOOT1.1@-136.69,1140 -136.69,1050 -71.69,985 ; v1(-135,2237.2) -103,2237.2 -7.8,2332.41 -7.8,2354.41 P2.2@0,2362.2 ; v1(294,1120) 293,1120 158,985 -91,985 -91,-71 -47,-115 2882,-115 2975,-22 2975,365 v1(2864,476) ; C39.1@600,1270 C38.1@650,1320 ; v1(900,1240) 900,1250 903.63,1253.63 ; C7.2@1141.11,1351.11 C6.2@1091.11,1401.11 1091.11,1407.88 v1(1069.75,1429.24) 1069.75,1460 ; v1(1160,1050) 1150,1040 1090,1040 1090,1060 C35.1@980,1170 C34.1@930,1220 903.63,1246.37 903.63,1253.63 ; C32.1@1180,1070 C33.1@1230,1120 1290,1060 1290,980 1230,920 1230,880 1300,810 1330,810 v1(1350,830) 1350,540 1392,498 v1(1409,498) ; v1(1260,1640) 1240,1660 ; C9.1@1270,1490 C8.1@1220,1540 1200,1560 v1(1190,1560) ; C12.2@1351.11,1738.89 C13.2@1301.11,1688.89 1268.89,1688.89 1240,1660 ; C30.1@1370,850 C31.1@1420,900 1430,910 1563.96,910 1615.12,961.16 1615.12,982.66 1601.3,996.48 C22.2@1578.89,1018.89 C23.2@1528.89,1068.89 ; v1(1441.36,1499.14) 1451.11,1508.89 C15.2@1481.11,1508.89 C14.2@1531.11,1558.89 ; v1(1548.18,677.68) 1562.32,677.68 C28.1@1580,660 C29.1@1630,610 1650,590 v1(1660,590) ; v1(1556.04,1583.46) 1572.2,1599.63 1601.5,1599.63 1696.02,1505.1 v1(1696.02,1433.48) 1766.52,1433.48 1800,1400 1800,1340 C19.2@1798.89,1338.89 C18.2@1848.89,1288.89 ; v1(1571.61,1358.89) C17.2@1621.11,1358.89 C16.2@1671.11,1408.89 ; v1(1580,2055) 1590,2045 1590,1980 1700,1870 1813.5,1870 1815.94,1872.44 1815.94,1872.83 1816.1,1872.99 v1(1820,1872.99) ; v1(1605.98,996.48) 1666.48,996.48 1760,1090 1760,1110 1746.2,1123.8 v1(1746.2,1126.7) ; C21.2@1668.89,1198.89 C20.2@1718.89,1148.89 ; v1(2290,1890) 2290,1790 v1(2300,1780) ; v1(2700,855) 2700,823.31 R23.1@2703.31,820 2703.31,805.69 v1(2797,712) ; 903.63,1253.63 905.5,1253.63 990,1338.13 990,1430 1030,1470 1059.75,1470 1069.75,1460 ; 1069.75,1460 1069.75,1489.75 1140,1560 v1(1190,1560) ; v1(1190,1560) 1190,1610 1240,1660
pads on no net: JTAG1.11 JTAG1.17 JTAG1.19 P2.42 U1.106 U2.9 U2.10 U2.11 U2.12 U2.15 USB_232.4 USB_232.6 USB_232.7 USB_232.8 USB_232.9 USB_232.MH1 USB_232.MH2 USB_HOST1.4 USB_HOST1.6 USB_HOST1.7 USB_HOST1.8 USB_HOST1.9 USB_HOST1.MH1 USB_HOST1.MH2 Y1.3

## Polygon pours and split planes (outlines as drawn)
GND on Top Layer "TopOverlay-No Net" (hatched 90Degree grid 20 track 10, remove dead copper, pour order 1000): -482.77,2713.99 -479.77,2710.99 3384.23,2710.99 3384.23,-289.01 3386.23,-291.01 3383.23,-288.01 -480.77,-288.01
GND on Bottom Layer "TopOverlay-No Net" (hatched 90Degree grid 20 track 10, remove dead copper, pour order 1001): -469.21,2712.05 -466.21,2709.05 3397.79,2709.05 3397.79,-290.95 3399.79,-292.95 3396.79,-289.95 -467.21,-289.95

## Keep-outs
Keep-Out Layer:
  the board outline again, w10

## Silkscreen, mask and mechanical layers (free items; w line width, h text height)
Top Overlay:
  rectangle: -51.12,2312 254,2562
  lines w4: 60.35,2277.72 90,2312.2 ; 71.78,2604.87 91,2569
  text "CAN_RX" at -65,2613 h30
  text "PE0" at 156,2579 h30
  text "PB8" at 317,2530 h28 r90
  text "PD8" at 2710,2530 h28 r90
  text "PD10" at 2610,2528 h28 r90
  text "PB6" at 415,2527.2 h28 r90
  text "PG15" at 513,2527.2 h28 r90
  text "VDDA" at 611,2527.2 h28 r90
  text "PG13" at 713,2527.2 h28 r90
  text "PG11" at 811,2527.2 h28 r90
  text "PG9" at 912,2527.2 h28 r90
  text "PD6" at 1012,2527.2 h28 r90
  text "PD4" at 1212,2527.2 h28 r90
  text "PD2" at 1315,2527.2 h28 r90
  text "PD0" at 1412,2527.2 h28 r90
  text "PC11" at 1512,2527.2 h28 r90
  text "PA10" at 1615,2527.2 h28 r90
  text "PA8" at 1714,2527.2 h28 r90
  text "PC8" at 1813,2527.2 h28 r90
  text "PC6" at 1912,2527.2 h28 r90
  text "PG8" at 2012,2527.2 h28 r90
  text "PG0" at 2415,2527 h28 r90
  text "PD12" at 2514,2527 h28 r90
  text "PB12" at 2912,2527 h28 r90
  text "PG6" at 2115,2526 h28 r90
  text "PB14" at 2813,2525 h28 r90
  text "PG4" at 2213,2524 h28 r90
  text "GND" at 1060,2523 h28
  text "PG2" at 2315,2523 h28 r90
  text "GNG" at -72,2468 h30 r90
  text "VDDA" at -68,2293 h30 r90
  text "PD11" at 2560,2278 h28
  text "PD5" at 1173,2272 h28
  text "PC9" at 1765,2272 h28
  text "NC" at 1978,2271 h28
  text "VDDA" at 1040,2270 h28
  text "PG1" at 2369.3,2269.3 h28
  text "PD13" at 2450,2269 h28
  text "PB5" at 462,2266.8 h28
  text "PG7" at 2062,2266.8 h28
  text "PG5" at 2162,2266.8 h28
  text "PG3" at 2262,2266.8 h28
  text "PD9" at 2662,2266.8 h28
  text "PE1" at 163,2240 h30
  text "PD1" at 1413,2240 h28 r90
  text "CAN_TX" at -85,2231 h30
  text "PC7" at 1920,2229 h28 r90
  text "GND" at 612,2227 h28 r90
  text "PD3" at 1319,2226 h28 r90
  text "PG6" at 1013.73,2223.73 h28 r90
  text "PB9" at 318,2223 h28 r90
  text "PA9" at 1713,2223 h28 r90
  text "PB7" at 421,2222 h28 r90
  text "PG14" at 717,2202 h28 r90
  text "PB13" at 2911,2202 h28 r90
  text "PG12" at 815,2200 h28 r90
  text "PG10" at 914,2200 h28 r90
  text "PC12" at 1516,2199 h28 r90
  text "PC10" at 1615,2199 h28 r90
  text "PB15" at 2818.89,2197.89 h28 r90
  text "BOOT1" at -71,1424 h28
  text "GND" at 203,1151 h28 r90
  text "VDDA" at -252,1139 h28 r90
  text "BOOT0" at -72,933 h28
  text "VDDA" at 614,173 h28 r90
  text "PF9" at 814,172 h28 r90
  text "PA5" at 1513,172 h28 r90
  text "RESET" at 910,170 h28 r90
  text "PE15" at 2612,170 h28 r90
  text "PA7" at 1615,169 h28 r90
  text "PC13" at 215,168 h28 r90
  text "PF7" at 716,167 h28 r90
  text "PA3" at 1414,167 h28 r90
  text "PE13" at 2513,167 h28 r90
  text "PB11" at 2714,167 h28 r90
  text "GND" at 2814,167 h28 r90
  text "VCC5V" at 2919,167 h28 r90
  text "PE5" at 116,166 h28 r90
  text "PF3" at 415,166 h28 r90
  text "PF5" at 511,166 h28 r90
  text "PC1" at 1012,166 h28 r90
  text "VDDA" at 1213,166 h28 r90
  text "PA5" at 1714,166 h28 r90
  text "PE11" at 2413,166 h28 r90
  text "PC3" at 1115,165 h28 r90
  text "PG0" at 2117,165 h28 r90
  text "PF1" at 313,164 h28 r90
  text "PE9" at 2317,164 h28 r90
  text "PA1" at 1311,163 h28 r90
  text "PE7" at 2217,163 h28 r90
  text "PE3" at 15,161 h28 r90
  text "PB1" at 1760,160 h28
  text "PF12" at 1850,160 h28
  text "PF14" at 1968,160 h28
  text "PG1" at 2217,-135 h28 r90
  text "PA0" at 1315,-138 h28 r90
  text "PE2" at 13,-139 h28 r90
  text "PE4" at 116,-139 h28 r90
  text "PF0" at 316,-139 h28 r90
  text "PF2" at 416,-140 h28 r90
  text "PB0" at 1817,-140 h28 r90
  text "PF4" at 519,-141 h28 r90
  text "PC4" at 1719,-141 h28 r90
  text "PC2" at 1118,-142 h28 r90
  text "GND" at 1215,-142 h28 r90
  text "PA2" at 1418,-142 h28 r90
  text "PE6" at 216,-143 h28 r90
  text "GND" at 617,-143 h28 r90
  text "PF6" at 717,-143 h28 r90
  text "PA4" at 1518,-143 h28 r90
  text "PF8" at 819,-144 h28 r90
  text "PC0" at 1016,-144 h28 r90
  text "PE8" at 2320,-144 h28 r90
  text "PA6" at 1617,-145 h28 r90
  text "GND" at 2814,-146 h28 r90
  text "PF11" at 1918,-154 h28 r90
  text "PF13" at 2017,-161 h28 r90
  text "PE12" at 2517,-162 h28 r90
  text "PE14" at 2620,-163 h28 r90
  text "PF10" at 917,-165 h28 r90
  text "PF15" at 2118,-167 h28 r90
  text "PB10" at 2715,-167 h28 r90
  text "PE10" at 2416,-168 h28 r90
  text "VCC5V" at 2920,-184 h28 r90
Mechanical 1:
  the board outline again, w10

## Dimensions
3096.85,2659.06 to 3096.85,-196.85 on Top Overlay
-393.7,2462.2 to 3293.7,2462.2 on Top Overlay

## Text inside footprints (layer, text, board x,y; h text height)
BOOT1: Top Overlay "5" at 123.31,1120 h50; Top Overlay "1" at -216.69,1120 h50; Top Overlay "2" at -236.69,1220 h50; Top Overlay "6" at 123.31,1220 h50
CAN_BUS1: Top Overlay "CAN_TX" at 2198,2205 h28; Top Overlay "CAN_RX" at 2402,2203 h28; Top Overlay "D+" at 2365,1857 h50 r270; Top Overlay "D-" at 2472,1859 h50 r270
P1: Bottom Overlay "2" at -13,-84 h50 r180; Bottom Overlay "1" at -8,236 h50 r180; Bottom Overlay "59" at 2868,228 h50 r180; Bottom Overlay "60" at 2864,-71 h50 r180
P2: Bottom Overlay "2" at -16,2282 h50 r180; Bottom Overlay "1" at -1,2599 h50 r180; Bottom Overlay "59" at 2859,2597 h50 r180; Bottom Overlay "60" at 2860,2282 h50 r180
U6: Top Overlay "1" at 2407.34,982.94 h50